# EAGLE board CT_schematic (EAGLE 7.6.0)

Size 100 x 80 mm. Coordinates in mm from the lower left corner, seen from the top.
Outline: 0,0 100,0 100,80 0,80 0,0
Copper layers (1*16): Top 0.035mm / dielectric 1.5mm / Bottom 0.035mm
Design rules "default": minimum track width 10mil, minimum drill 24mil, track to track 8mil, track to pad 8mil, pad to pad 8mil, via to via 8mil, smd to smd 8mil, copper to edge 40mil, drill to drill 8mil, minimum pad ring 10mil, minimum via ring 8mil, stop-mask expansion 4mil, vias tented up to drill 0mil, thermal gap 10mil

## Footprints (pad centres in the part's own frame; a part is rotated, then mirrored left to right if it is on the bottom)
C0603 = smd 0.8 x 0.8: 1 -0.762,0; 2 0.762,0
C0402 = smd 0.5 x 0.5: 1 -0.508,0; 2 0.508,0
C1210 = smd 1.2 x 2.5: 1 -1.524,0; 2 1.524,0
EXV-9H = smd 3.505 x 1.676: 1 -2.857,0; 2 2.857,0
L0603 = smd 0.8 x 0.8: 1 -0.762,0; 2 0.762,0
PJ-037B_PACKAGE = drill 3.7 square: 1 12,0 | drill 3.2 square: 2 6,0
R0603 = smd 0.8 x 0.8: 1 -0.762,0; 2 0.762,0
WLCSP168 = smd 0.2 x 0.2: A1 -2.2,2.6; A2 -1.8,2.6; A3 -1.4,2.6; A4 -1,2.6; A5 -0.6,2.6; A6 -0.2,2.6; A7 0.2,2.6; A8 0.6,2.6; A9 1,2.6; A10 1.4,2.6; A11 1.8,2.6; A12 2.2,2.6; B1 -2.2,2.2; B2 -1.8,2.2; B3 -1.4,2.2; B4 -1,2.2; B5 -0.6,2.2; B6 -0.2,2.2; B7 0.2,2.2; B8 0.6,2.2; B9 1,2.2; B10 1.4,2.2; B11 1.8,2.2; B12 2.2,2.2; C1 -2.2,1.8; C2 -1.8,1.8; C3 -1.4,1.8; C4 -1,1.8; C5 -0.6,1.8; C6 -0.2,1.8; C7 0.2,1.8; C8 0.6,1.8; C9 1,1.8; C10 1.4,1.8; C11 1.8,1.8; C12 2.2,1.8; D1 -2.2,1.4; D2 -1.8,1.4; D3 -1.4,1.4; D4 -1,1.4; D5 -0.6,1.4; D6 -0.2,1.4; D7 0.2,1.4; D8 0.6,1.4; D9 1,1.4; D10 1.4,1.4; D11 1.8,1.4; D12 2.2,1.4; E1 -2.2,1; E2 -1.8,1; E3 -1.4,1; E4 -1,1; E5 -0.6,1; E6 -0.2,1; E7 0.2,1; E8 0.6,1; E9 1,1; E10 1.4,1; E11 1.8,1; E12 2.2,1; F1 -2.2,0.6; F2 -1.8,0.6; F3 -1.4,0.6; F4 -1,0.6; F5 -0.6,0.6; F6 -0.2,0.6; F7 0.2,0.6; F8 0.6,0.6; F9 1,0.6; F10 1.4,0.6; F11 1.8,0.6; F12 2.2,0.6; G1 -2.2,0.2; G2 -1.8,0.2; G3 -1.4,0.2; G4 -1,0.2; G5 -0.6,0.2; G6 -0.2,0.2; G7 0.2,0.2; G8 0.6,0.2; G9 1,0.2; G10 1.4,0.2; G11 1.8,0.2; G12 2.2,0.2; H1 -2.2,-0.2; H2 -1.8,-0.2; H3 -1.4,-0.2; H4 -1,-0.2; H5 -0.6,-0.2; H6 -0.2,-0.2; H7 0.2,-0.2; H8 0.6,-0.2; H9 1,-0.2; H10 1.4,-0.2; H11 1.8,-0.2; H12 2.2,-0.2; J1 -2.2,-0.6; J2 -1.8,-0.6; J3 -1.4,-0.6; J4 -1,-0.6; J5 -0.6,-0.6; J6 -0.2,-0.6; J7 0.2,-0.6; J8 0.6,-0.6; J9 1,-0.6; J10 1.4,-0.6; J11 1.8,-0.6; J12 2.2,-0.6; K1 -2.2,-1; K2 -1.8,-1; K3 -1.4,-1; K4 -1,-1; K5 -0.6,-1; K6 -0.2,-1; K7 0.2,-1; K8 0.6,-1; K9 1,-1; K10 1.4,-1; K11 1.8,-1; K12 2.2,-1; L1 -2.2,-1.4; L2 -1.8,-1.4; L3 -1.4,-1.4; L4 -1,-1.4; L5 -0.6,-1.4; L6 -0.2,-1.4; L7 0.2,-1.4; L8 0.6,-1.4; L9 1,-1.4; L10 1.4,-1.4; L11 1.8,-1.4; L12 2.2,-1.4; M1 -2.2,-1.8; M2 -1.8,-1.8; M3 -1.4,-1.8; M4 -1,-1.8; M5 -0.6,-1.8; M6 -0.2,-1.8; M7 0.2,-1.8; M8 0.6,-1.8; M9 1,-1.8; M10 1.4,-1.8; M11 1.8,-1.8; M12 2.2,-1.8; N1 -2.2,-2.2; N2 -1.8,-2.2; N3 -1.4,-2.2; N4 -1,-2.2; N5 -0.6,-2.2; N6 -0.2,-2.2; N7 0.2,-2.2; N8 0.6,-2.2; N9 1,-2.2; N10 1.4,-2.2; N11 1.8,-2.2; N12 2.2,-2.2; P1 -2.2,-2.6; P2 -1.8,-2.6; P3 -1.4,-2.6; P4 -1,-2.6; P5 -0.6,-2.6; P6 -0.2,-2.6; P7 0.2,-2.6; P8 0.6,-2.6; P9 1,-2.6; P10 1.4,-2.6; P11 1.8,-2.6; P12 2.2,-2.6
SOIC-8 = smd 1.6 x 0.6: 1 -2.7,1.905 | smd 1.55 x 0.6: 2 -2.7,0.635; 3 -2.7,-0.635; 4 -2.7,-1.905; 5 2.7,-1.905; 6 2.7,-0.635; 7 2.7,0.635; 8 2.7,1.905
LGA14R35P5X6_200X200X100 = smd 0.35 x 0.15: 1 -0.8,0.525; 2 -0.8,0.175; 3 -0.8,-0.175; 4 -0.8,-0.525; 8 0.8,-0.525; 9 0.8,-0.175; 10 0.8,0.175; 11 0.8,0.525 | smd 0.15 x 0.35: 5 -0.35,-0.8; 6 0,-0.8; 7 0.35,-0.8; 12 0.35,0.8; 13 0,0.8; 14 -0.35,0.8
PC28F512P33BFD = smd 0.45 x 0.45: A1 0,0; A2 1,0; A3 2,0; A4 3,0; A5 4,0; A6 5,0; A7 6,0; A8 7,0; B1 0,-1; B2 1,-1; B3 2,-1; B4 3,-1; B5 4,-1; B6 5,-1; B7 6,-1; B8 7,-1; C1 0,-2; C2 1,-2; C3 2,-2; C4 3,-2; C5 4,-2; C6 5,-2; C7 6,-2; C8 7,-2; D1 0,-3; D2 1,-3; D3 2,-3; D4 3,-3; D5 4,-3; D6 5,-3; D7 6,-3; D8 7,-3; E1 0,-4; E2 1,-4; E3 2,-4; E4 3,-4; E5 4,-4; E6 5,-4; E7 6,-4; E8 7,-4; F1 0,-5; F2 1,-5; F3 2,-5; F4 3,-5; F5 4,-5; F6 5,-5; F7 6,-5; F8 7,-5; G1 0,-6; G2 1,-6; G3 2,-6; G4 3,-6; G5 4,-6; G6 5,-6; G7 6,-6; G8 7,-6; H1 0,-7; H2 1,-7; H3 2,-7; H4 3,-7; H5 4,-7; H6 5,-7; H7 6,-7; H8 7,-7
ASEK = smd 1.4 x 1: 1 -1.1,-0.8; 2 1.1,-0.8; 3 1.1,0.8; 4 -1.1,0.8
ASFL1 = smd 1.7 x 1.5: 1 -1.27,-1.1; 2 1.27,-1.1; 3 1.27,1.1; 4 -1.27,1.1
WSON-8 = smd 0.3 x 0.6: 1 -0.75,0; 2 0.05,0; 3 0.85,0; 4 1.65,0; 5 1.65,3.8; 6 0.85,3.8; 7 0.05,3.8; 8 -0.75,3.8 | smd 3 x 2.6: PAD 0.45,1.9
SON-6 = smd 0.55 x 0.3: 1 -0.355,0.5 | smd 0.52 x 0.3: 2 -0.37,0; 3 -0.37,-0.5; 4 0.37,-0.5; 5 0.37,0; 6 0.37,0.5
SW_4-1437565-2 = smd 1.4 x 2.1: 1 -2.23,4.55; 2 -2.23,-4.55; 3 2.23,4.55; 4 2.23,-4.55
LGM67K-G1J2-24-Z = smd 0.8 x 1.4: A -2,0; C 0,0
NC7SZ125M5X = smd 1.3 x 0.7: 1 -1.3,0.95; 2 -1.3,0; 3 -1.3,-0.95; 4 1.3,-0.95; 5 1.3,0.95
DUMMY_PACKAGE_174 = drill 0.3: 1 0,-1; 2 1.5,-1; 3 3,-1

## Placement (x,y rotation side)
C1  1e-06  [C0603]  -66.04,52.07 0 top  (outside the outline)
C2  1e-07  [C0603]  -15.24,57.15 0 top  (outside the outline)
C3  1e-07  [C0603]  -19.05,57.15 0 top  (outside the outline)
C4  1e-07  [C0603]  -22.86,57.15 0 top  (outside the outline)
C5  1e-07  [C0603]  -26.67,57.15 0 top  (outside the outline)
C6  1e-07  [C0603]  -30.48,57.15 0 top  (outside the outline)
C7  1e-07  [C0603]  -34.29,57.15 0 top  (outside the outline)
C8  1e-07  [C0603]  -38.1,57.15 0 top  (outside the outline)
C9  1e-07  [C0603]  -41.91,57.15 0 top  (outside the outline)
C10  1e-07  [C0603]  -45.72,57.15 0 top  (outside the outline)
C11  1e-07  [C0603]  -49.53,57.15 0 top  (outside the outline)
C12  4.7e-06  [C0603]  -54.61,52.07 0 top  (outside the outline)
C13  2.2e-06  [C0603]  -58.42,52.07 0 top  (outside the outline)
C14  2.2e-06  [C0603]  -62.23,52.07 0 top  (outside the outline)
C15  1e-08  [C0603]  -53.34,57.15 0 top  (outside the outline)
C16  1e-06  [C0603]  -57.15,57.15 0 top  (outside the outline)
C17  1e-07  [C0603]  -60.96,57.15 0 top  (outside the outline)
C18  1e-08  [C0402]  -45.72,62.23 0 top  (outside the outline)
C19  1e-07  [C0402]  -49.53,62.23 0 top  (outside the outline)
C20  1e-07  [C0402]  -53.34,62.23 0 top  (outside the outline)
C21  1e-07  [C0402]  -57.15,62.23 0 top  (outside the outline)
C22  1e-08  [C0402]  -60.96,62.23 0 top  (outside the outline)
C23  1e-07  [C0402]  -64.77,62.23 0 top  (outside the outline)
C24  1e-08  [C0402]  -15.24,67.31 0 top  (outside the outline)
C25  1e-07  [C0402]  -19.05,67.31 0 top  (outside the outline)
C26  1e-08  [C0402]  -22.86,67.31 0 top  (outside the outline)
C27  1e-08  [C0402]  -26.67,67.31 0 top  (outside the outline)
C28  1e-08  [C0402]  -30.48,67.31 0 top  (outside the outline)
C29  1e-08  [C0402]  -34.29,67.31 0 top  (outside the outline)
C30  1e-05  [C1210]  -48.26,38.1 0 top  (outside the outline)
C31  1e-05  [C1210]  -54.61,38.1 0 top  (outside the outline)
C32  1e-07  [C0402]  -38.1,67.31 0 top  (outside the outline)
C33  0.0001  [EXV-9H]  -55.88,30.48 0 top  (outside the outline)
C34  0.0001  [EXV-9H]  -17.78,39.37 0 top  (outside the outline)
C35  1e-08  [C0402]  -41.91,67.31 0 top  (outside the outline)
C36  1e-08  [C0402]  -45.72,67.31 0 top  (outside the outline)
F1  240.0  [L0603]  -64.77,57.15 0 top  (outside the outline)
J1  PJ-037B  [PJ-037B_PACKAGE]  -27.94,7.62 0 top  (outside the outline)
R2  1000.0  [R0603]  -15.24,62.23 0 top  (outside the outline)
R4  4700.0  [R0603]  -19.05,62.23 0 top  (outside the outline)
R5  4700.0  [R0603]  -22.86,62.23 0 top  (outside the outline)
R6  2200.0  [R0603]  -26.67,62.23 0 top  (outside the outline)
R7  2200.0  [R0603]  -30.48,62.23 0 top  (outside the outline)
R8  10000.0  [R0603]  -36.83,45.72 0 top  (outside the outline)
R9  10000.0  [R0603]  -41.91,45.72 0 top  (outside the outline)
R10  10000.0  [R0603]  -46.99,45.72 0 top  (outside the outline)
R11  10000.0  [R0603]  -52.07,45.72 0 top  (outside the outline)
R12  10000.0  [R0603]  -57.15,45.72 0 top  (outside the outline)
R13  10000.0  [R0603]  -62.23,45.72 0 top  (outside the outline)
R14  10000.0  [R0603]  -15.24,52.07 0 top  (outside the outline)
R15  10000.0  [R0603]  -20.32,52.07 0 top  (outside the outline)
R16  10000.0  [R0603]  -25.4,52.07 0 top  (outside the outline)
R17  10000.0  [R0603]  -30.48,52.07 0 top  (outside the outline)
R18  10000.0  [R0603]  -35.56,52.07 0 top  (outside the outline)
R19  10000.0  [R0603]  -40.64,52.07 0 top  (outside the outline)
R20  100000.0  [R0603]  -21.59,45.72 0 top  (outside the outline)
R21  2231.0  [R0603]  -34.29,62.23 0 top  (outside the outline)
R22  1000.0  [R0603]  -38.1,62.23 0 top  (outside the outline)
R23  10000.0  [R0603]  -45.72,52.07 0 top  (outside the outline)
R24  10000.0  [R0603]  -50.8,52.07 0 top  (outside the outline)
R25  9100.0  [R0603]  -41.91,62.23 0 top  (outside the outline)
R26  680000.0  [R0603]  -26.67,45.72 0 top  (outside the outline)
R27  120000.0  [R0603]  -31.75,45.72 0 top  (outside the outline)
U1  STM32F479AIY6TR  [WLCSP168]  -26.67,20.32 0 top  (outside the outline)
U2  AT25010B-SSHL-T  [SOIC-8]  -41.91,19.05 0 top  (outside the outline)
U3  BMC150  [LGA14R35P5X6_200X200X100]  -43.18,38.1 0 top  (outside the outline)
U4  PC28F512P33BFD  [PC28F512P33BFD]  -44.45,10.16 0 top  (outside the outline)
U5  ASEK-32.768KHz-ECST  [ASEK]  -46.99,30.48 0 top  (outside the outline)
U6  ASFL1-25MHZ-NCS  [ASFL1]  -26.67,30.48 0 top  (outside the outline)
U7  LP3878SDX-ADJ/NOPB  [WSON-8]  -63.5,17.78 0 top  (outside the outline)
U8  TPS3895ADRYR  [SON-6]  -54.61,66.04 0 top  (outside the outline)
U9  4-1437565-2  [SW_4-1437565-2]  -60.96,6.35 0 top  (outside the outline)
U10  Q65110A2395  [LGM67K-G1J2-24-Z]  -27.94,38.1 0 top  (outside the outline)
U11  nc7sz125m5x  [NC7SZ125M5X]  -59.69,36.83 0 top  (outside the outline)
U12  nc7sz125m5x  [NC7SZ125M5X]  -15.24,45.72 0 top  (outside the outline)
U13  Dummy  [DUMMY_PACKAGE_174]  -52.07,67.31 0 top  (outside the outline)

## Library data of the parts
C1-C36 F1 J1 R2 R4-R27 U1-U13 = circuit_tree

## Nets
CLK_U1_E11: U1.E11 U5.3
CLK_U1_K11: U1.K11 U6.3
GND: C1.2 C2.2 C3.2 C4.2 C5.2 C6.2 C7.2 C8.2 C9.2 C10.2 C11.2 C12.2 C13.2 C14.2 C15.2 C16.2 C17.2 C18.2 C19.2 C20.2 C21.2 C22.2 C23.2 C24.2 C25.2 C26.2 C27.2 C28.2 C29.2 C30.2 C31.2 C32.2 C33.2 C34.2 C35.2 C36.2 J1.2 R2.2 R10.2 R22.2 R25.2 R27.2 U1.A4 U1.B7 U1.B10 U1.C1 U1.F2 U1.F12 U1.H1 U1.H7 U1.J11 U1.L11 U1.M1 U1.N8 U1.N11 U1.P4 U2.4 U3.1 U3.6 U3.7 U3.9 U4.B2 U4.H2 U4.H4 U4.H6 U5.2 U6.2 U7.3 U7.PAD U8.2 U10.C U11.1 U11.3 U12.1 U12.3 U13.1
NET_U1_B9: R6.1 U1.B9 U3.11
NET_U1_D2: C14.1 U1.D2
NET_U1_D9: R8.1 U1.D9
NET_U1_E9: R7.1 U1.E9 U3.14
NET_U1_F8: R9.1 U1.F8
NET_U1_H9: R5.1 U1.H9 U12.4
NET_U1_K1: U1.K1
NET_U1_K2: U1.K2
NET_U1_M12: C15.1 C16.1 F1.1 U1.M12
NET_U1_N4: C13.1 U1.N4
NET_U1_P9: R10.1 U1.P9
NET_U1_P10: U10.A
NET_U1_P11: U9.3 U9.4
NET_U2_3: R11.1 U2.3
NET_U2_7: R13.1 U2.7
NET_U4_A4: C25.1 C26.1 U4.A4
NET_U4_C6: R18.1 U4.C6
NET_U4_D4: R4.1 U4.D4 U11.4
NET_U7_1: C29.1 U7.1
NET_U7_6: R21.2 R22.1 U7.6
NET_U7_8: R20.1 U7.8
NET_U8_1: R24.1 R25.1 U8.1
NET_U8_3: R26.2 R27.1 U8.3
NET_U8_4: R23.1 U8.4 U11.2 U12.2
NET_U9_1: R2.1 U9.1 U9.2
PROC_FMC_A0: U1.G10 U4.A1
PROC_FMC_A1: U1.H10 U4.B1
PROC_FMC_A2: U1.G12 U4.C1
PROC_FMC_A3: U1.H11 U4.D1
PROC_FMC_A4: U1.J10 U4.D2
PROC_FMC_A5: U1.H12 U4.A2
PROC_FMC_A6: U1.M8 U4.C2
PROC_FMC_A7: U1.J7 U4.A3
PROC_FMC_A8: U1.L7 U4.B3
PROC_FMC_A9: U1.H8 U4.C3
PROC_FMC_A10: U1.J6 U4.D3
PROC_FMC_A11: U1.P7 U4.C4
PROC_FMC_A12: U1.G5 U4.A5
PROC_FMC_A13: U1.G4 U4.B5
PROC_FMC_A14: U1.G2 U4.C5
PROC_FMC_A15: U1.G1 U4.D7
PROC_FMC_A16: U1.J4 U4.D8
PROC_FMC_A17: U1.M2 U4.A7
PROC_FMC_A18: U1.H4 U4.B7
PROC_FMC_A19: U1.E10 U4.C7
PROC_FMC_A20: U1.C11 U4.C8
PROC_FMC_A21: U1.B12 U4.A8
PROC_FMC_A22: U1.D11 U4.G1
PROC_FMC_A23: U1.F9 U4.H8
PROC_FMC_A24: U1.E8 U4.B6
PROC_FMC_CLK: U1.D6 U4.E6
PROC_FMC_D0: U1.L3 U4.F2
PROC_FMC_D1: U1.L2 U4.E2
PROC_FMC_D2: U1.E6 U4.G3
PROC_FMC_D3: U1.A3 U4.E4
PROC_FMC_D4: U1.N7 U4.E5
PROC_FMC_D5: U1.M7 U4.G5
PROC_FMC_D6: U1.K6 U4.G6
PROC_FMC_D7: U1.P6 U4.H7
PROC_FMC_D8: U1.N6 U4.E1
PROC_FMC_D9: U1.M6 U4.E3
PROC_FMC_D10: U1.L6 U4.F3
PROC_FMC_D11: U1.J5 U4.F4
PROC_FMC_D12: U1.P5 U4.F5
PROC_FMC_D13: U1.L4 U4.H5
PROC_FMC_D14: U1.N1 U4.G7
PROC_FMC_D15: U1.M3 U4.E7
PROC_FMC_NE2: R16.1 U1.D7 U4.B4
PROC_FMC_NL: R15.1 U1.A9 U4.F6
PROC_FMC_NOE: R17.1 U1.B4 U4.F8
PROC_FMC_NWAIT: U1.E7 U4.F7
PROC_FMC_NWE: R19.1 U1.C6 U4.G8
PROC_SPI1_MISO: U1.C8 U2.2
PROC_SPI1_MOSI: U1.B8 U2.5
PROC_SPI1_NSS: R12.1 U1.A2 U2.1
PROC_SPI1_SCK: U1.A8 U2.6
PROC_TIM1_CH1: U1.E1 U13.3
PROC_TIM1_CH2: U1.E2 U13.2
VCC_S1_15V5: C30.1 C33.1 C34.1 J1.1 R20.2 U7.4
VCC_TIER1_3V3: C1.1 C2.1 C3.1 C4.1 C5.1 C6.1 C7.1 C8.1 C9.1 C10.1 C11.1 C12.1 C17.1 C18.1 C19.1 C20.1 C21.1 C22.1 C23.1 C24.1 C27.1 C28.1 C31.1 C32.1 C35.1 C36.1 F1.2 R4.2 R5.2 R6.2 R7.2 R8.2 R9.2 R11.2 R12.2 R13.2 R14.1 R14.2 R15.2 R16.2 R17.2 R18.2 R19.2 R21.1 R23.2 R24.2 R26.1 U1.A7 U1.A11 U1.B5 U1.C2 U1.C12 U1.F1 U1.G11 U1.J12 U1.L1 U1.P3 U1.P8 U1.P12 U2.8 U3.8 U3.10 U3.12 U3.13 U4.A6 U4.D5 U4.D6 U4.G4 U4.H3 U5.4 U6.4 U7.5 U8.6 U11.5 U12.5

## Tracks (layer width: path | path; a pad name or v marks a point on that pad's centre or on a via)
CLK_U1_E11  (1 unrouted)
CLK_U1_K11  (1 unrouted)
GND  (75 unrouted)
NET_U1_B9  (2 unrouted)
NET_U1_D2  (1 unrouted)
NET_U1_D9  (1 unrouted)
NET_U1_E9  (2 unrouted)
NET_U1_F8  (1 unrouted)
NET_U1_H9  (2 unrouted)
NET_U1_M12  (3 unrouted)
NET_U1_N4  (1 unrouted)
NET_U1_P9  (1 unrouted)
NET_U1_P11  (1 unrouted)
NET_U2_3  (1 unrouted)
NET_U2_7  (1 unrouted)
NET_U4_A4  (2 unrouted)
NET_U4_C6  (1 unrouted)
NET_U4_D4  (2 unrouted)
NET_U7_1  (1 unrouted)
NET_U7_6  (2 unrouted)
NET_U7_8  (1 unrouted)
NET_U8_1  (2 unrouted)
NET_U8_3  (2 unrouted)
NET_U8_4  (3 unrouted)
NET_U9_1  (2 unrouted)
PROC_FMC_A0  (1 unrouted)
PROC_FMC_A1  (1 unrouted)
PROC_FMC_A2  (1 unrouted)
PROC_FMC_A3  (1 unrouted)
PROC_FMC_A4  (1 unrouted)
PROC_FMC_A5  (1 unrouted)
PROC_FMC_A6  (1 unrouted)
PROC_FMC_A7  (1 unrouted)
PROC_FMC_A8  (1 unrouted)
PROC_FMC_A9  (1 unrouted)
PROC_FMC_A10  (1 unrouted)
PROC_FMC_A11  (1 unrouted)
PROC_FMC_A12  (1 unrouted)
PROC_FMC_A13  (1 unrouted)
PROC_FMC_A14  (1 unrouted)
PROC_FMC_A15  (1 unrouted)
PROC_FMC_A16  (1 unrouted)
PROC_FMC_A17  (1 unrouted)
PROC_FMC_A18  (1 unrouted)
PROC_FMC_A19  (1 unrouted)
PROC_FMC_A20  (1 unrouted)
PROC_FMC_A21  (1 unrouted)
PROC_FMC_A22  (1 unrouted)
PROC_FMC_A23  (1 unrouted)
PROC_FMC_A24  (1 unrouted)
PROC_FMC_CLK  (1 unrouted)
PROC_FMC_D0  (1 unrouted)
PROC_FMC_D1  (1 unrouted)
PROC_FMC_D2  (1 unrouted)
PROC_FMC_D3  (1 unrouted)
PROC_FMC_D4  (1 unrouted)
PROC_FMC_D5  (1 unrouted)
PROC_FMC_D6  (1 unrouted)
PROC_FMC_D7  (1 unrouted)
PROC_FMC_D8  (1 unrouted)
PROC_FMC_D9  (1 unrouted)
PROC_FMC_D10  (1 unrouted)
PROC_FMC_D11  (1 unrouted)
PROC_FMC_D12  (1 unrouted)
PROC_FMC_D13  (1 unrouted)
PROC_FMC_D14  (1 unrouted)
PROC_FMC_D15  (1 unrouted)
PROC_FMC_NE2  (2 unrouted)
PROC_FMC_NL  (2 unrouted)
PROC_FMC_NOE  (2 unrouted)
PROC_FMC_NWAIT  (1 unrouted)
PROC_FMC_NWE  (2 unrouted)
PROC_SPI1_MISO  (1 unrouted)
PROC_SPI1_MOSI  (1 unrouted)
PROC_SPI1_NSS  (2 unrouted)
PROC_SPI1_SCK  (1 unrouted)
PROC_TIM1_CH1  (1 unrouted)
PROC_TIM1_CH2  (1 unrouted)
VCC_S1_15V5  (5 unrouted)
VCC_TIER1_3V3  (74 unrouted)